# Altium PCB PCB_Auto.PcbDoc (part 1 of 2)
Units mil, origin at the board's own origin, x right, y up, seen from the top; angles counter-clockwise.
Board outline 2561 x 3309 mil, 4 copper layers (Top Layer, Mid Layer 1, Mid Layer 2, Bottom Layer), stack 61.811 mil thick; 134 components, 109 nets, 467 pads, 114 vias.
Unrouted connection lines stored in the file: 1.
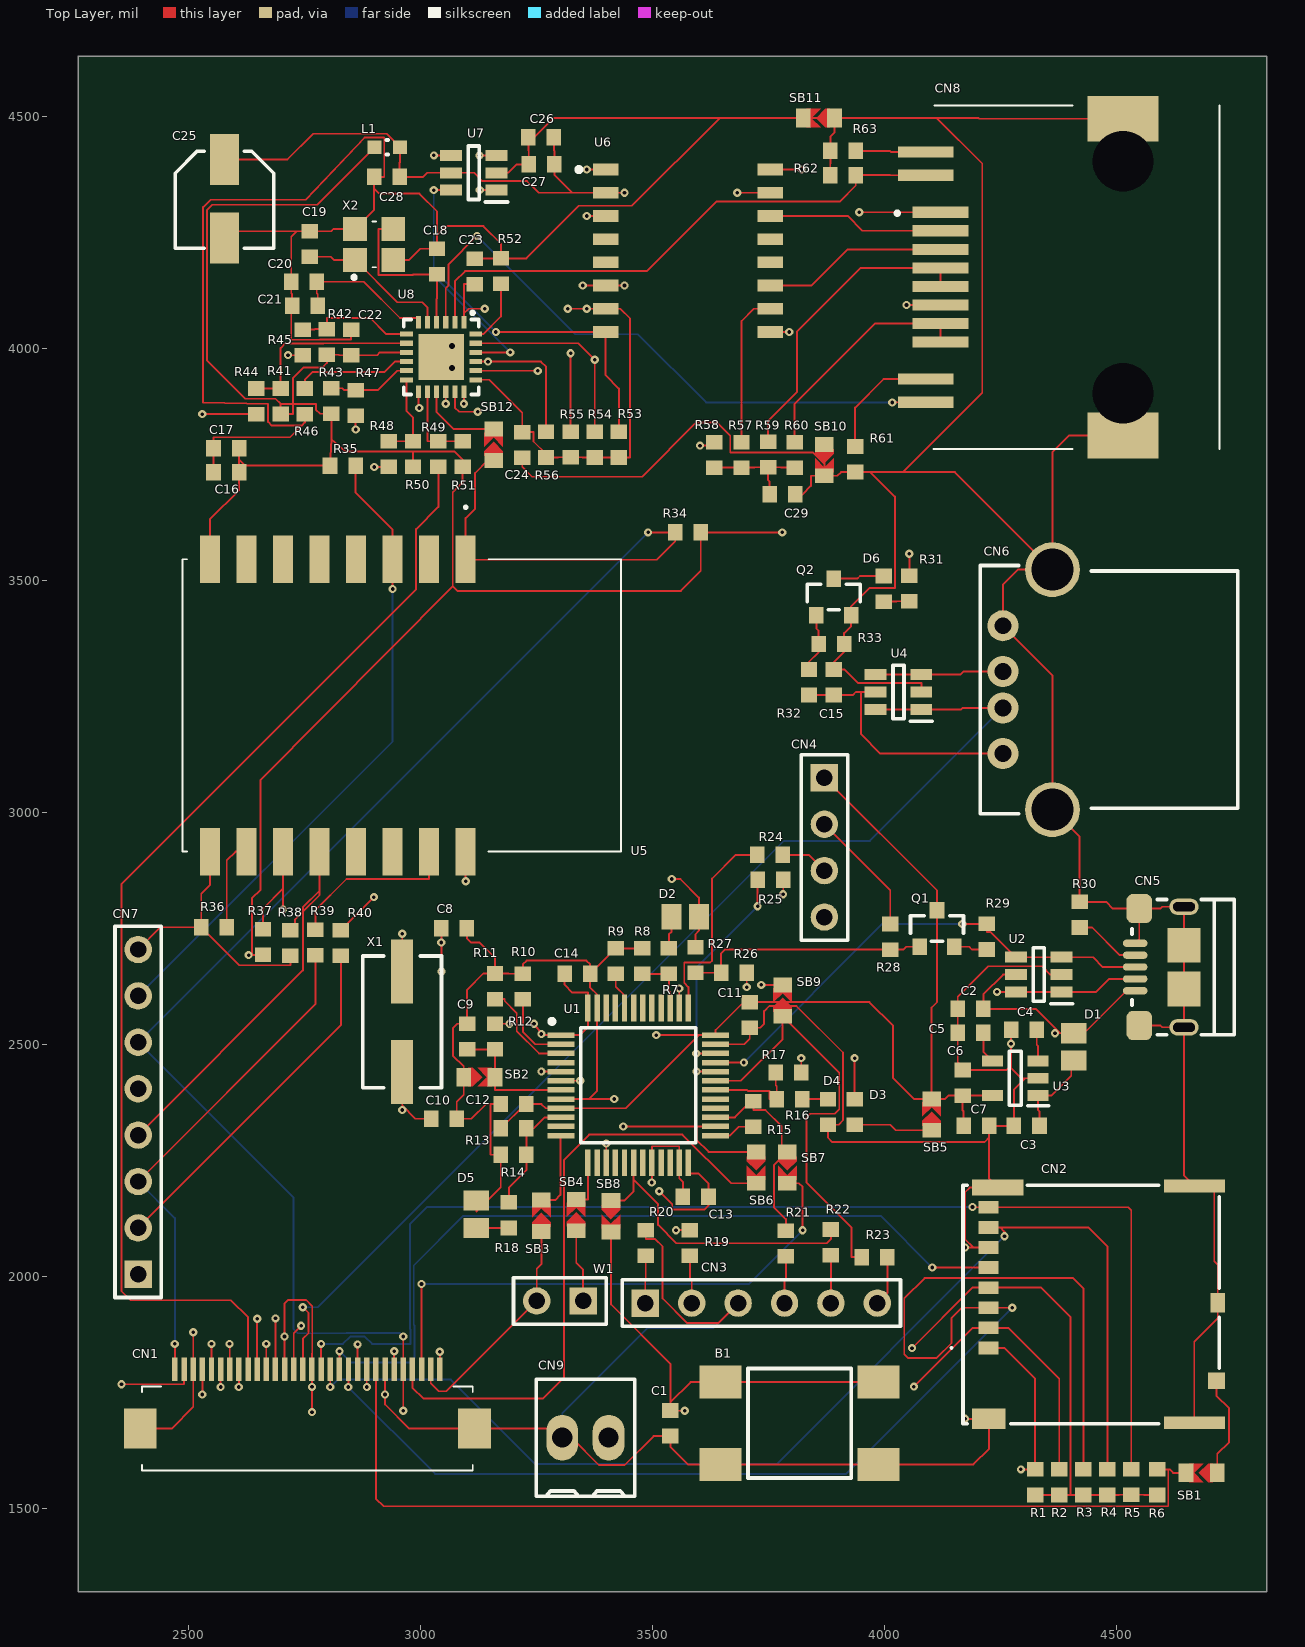
[diagram p0: Top Layer view]
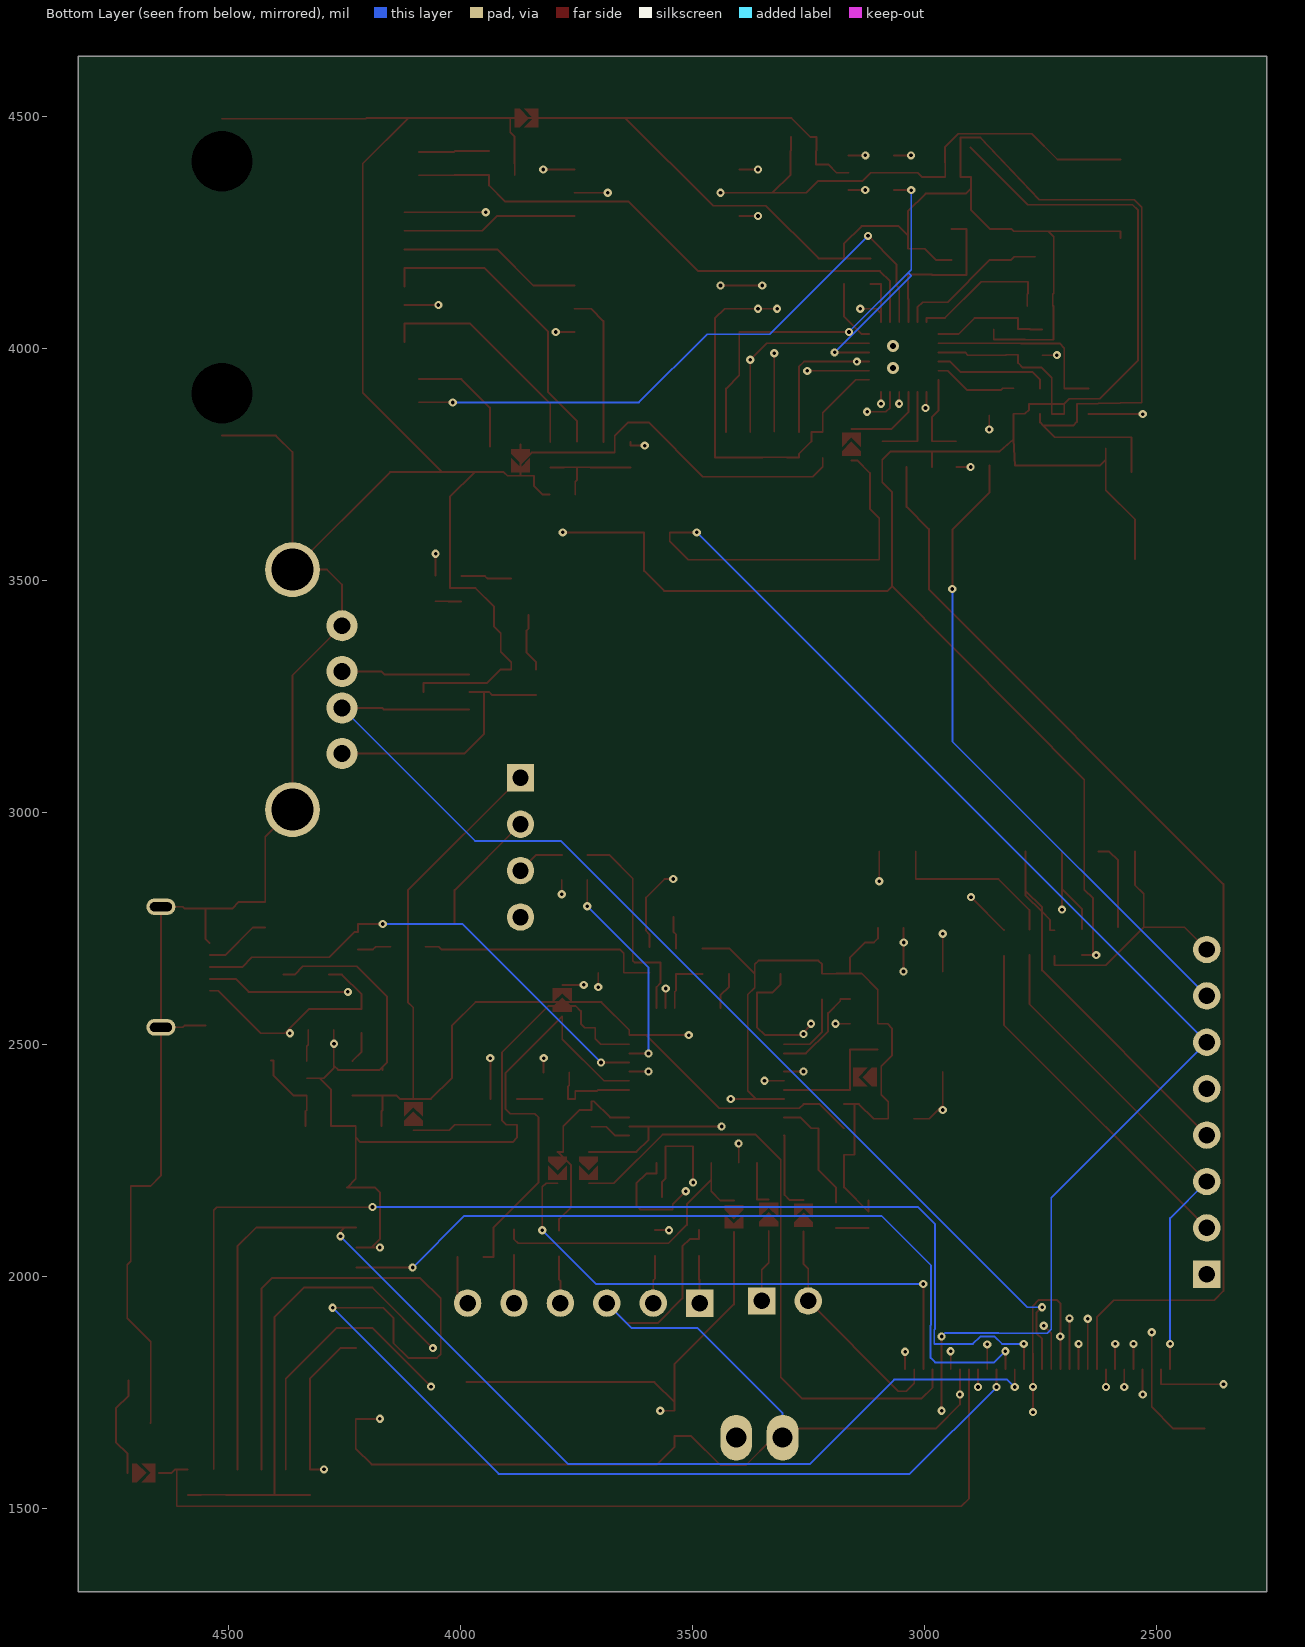
[diagram p1: Bottom Layer view, seen from below]
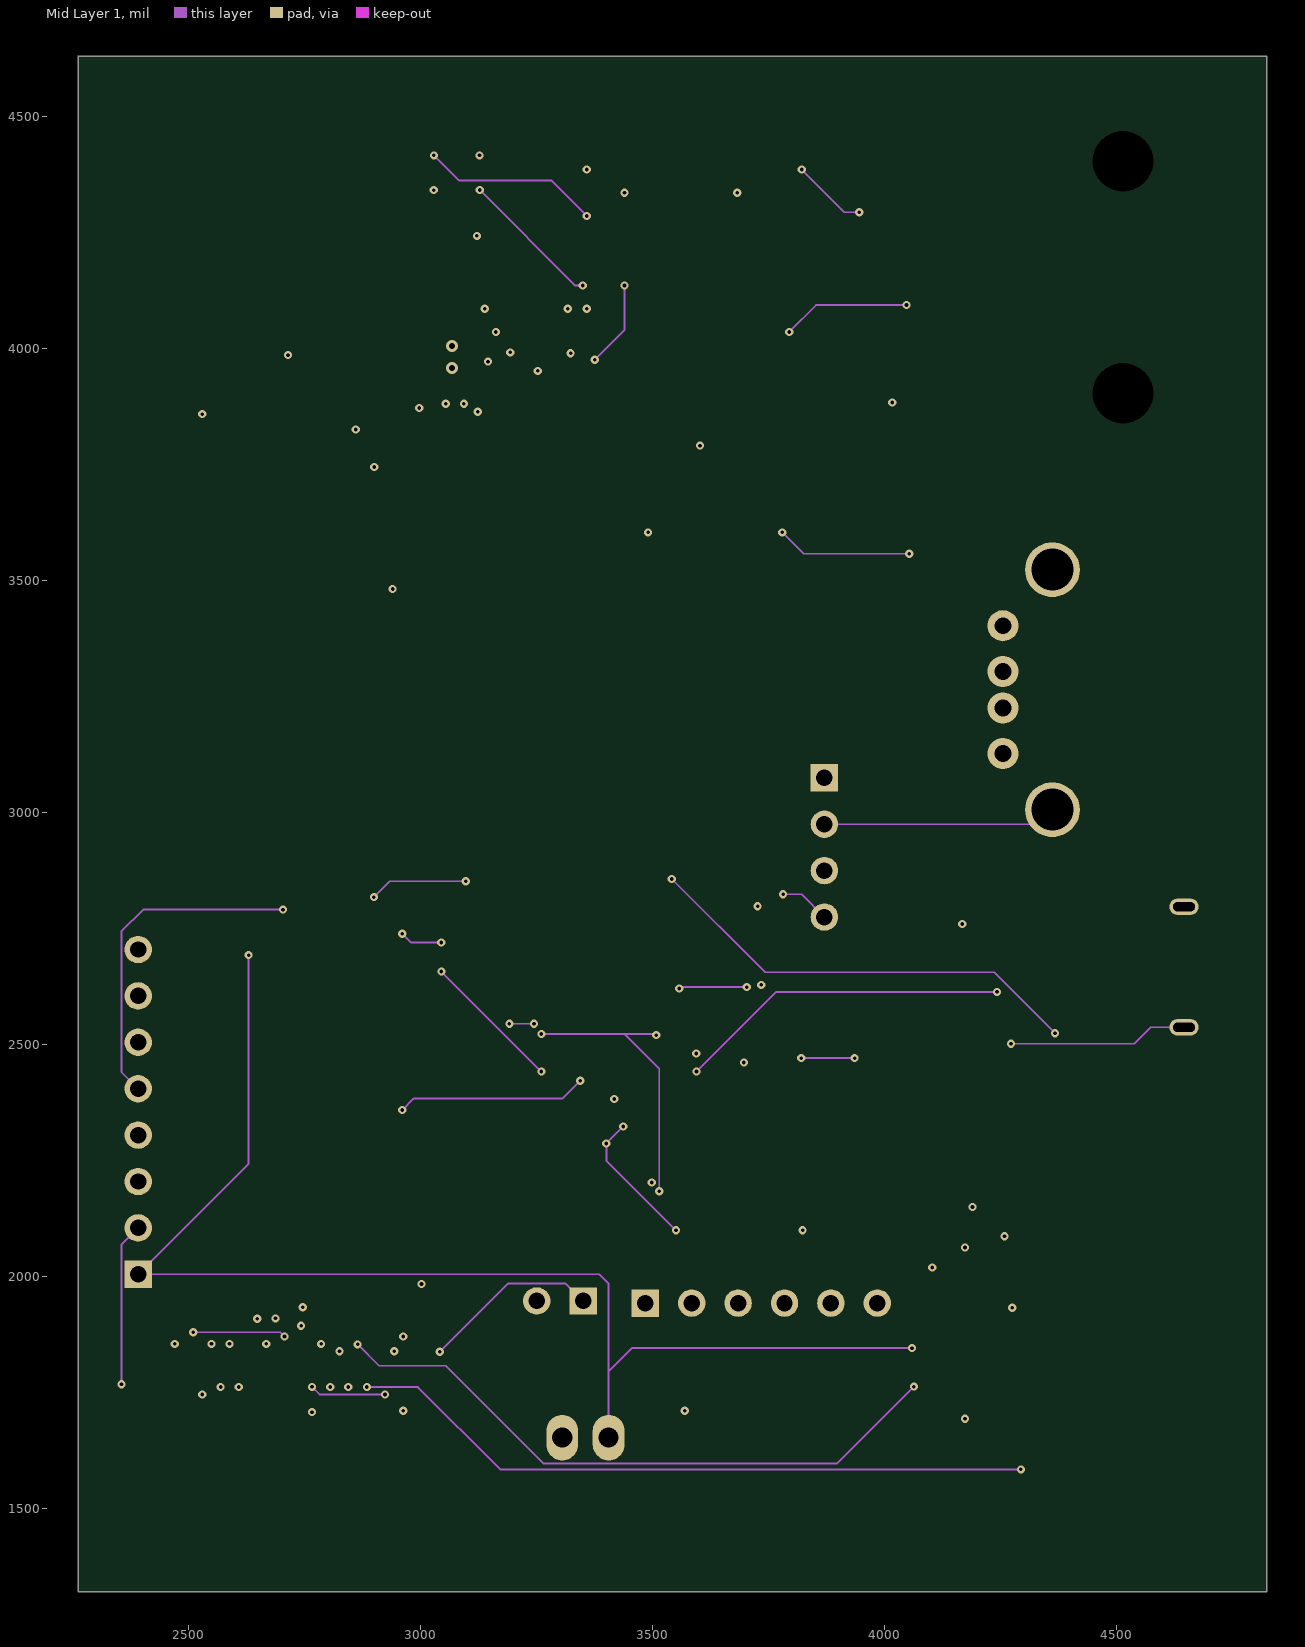
[diagram p2: Mid Layer 1]
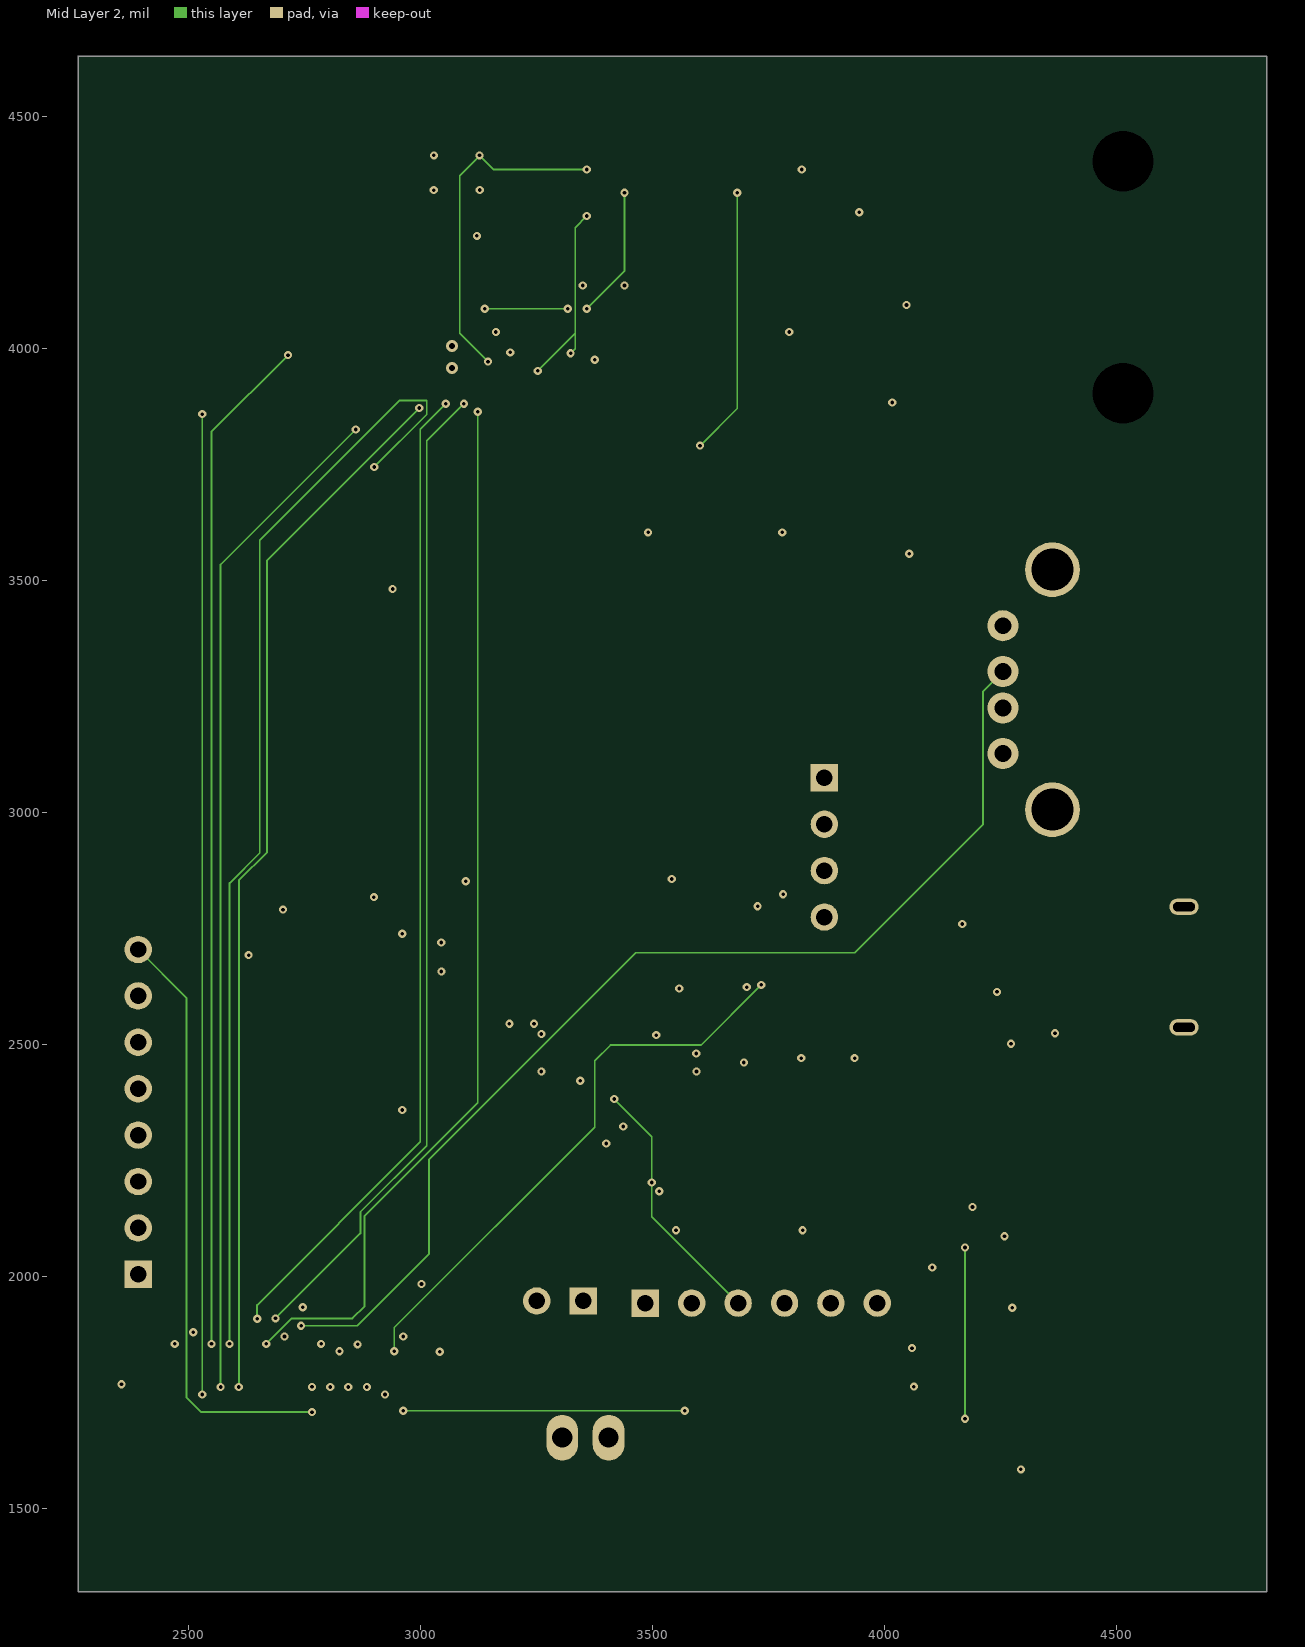
[diagram p3: Mid Layer 2]

## Layer stack, top to bottom
Top Solder: solder mask 0.5, Solder Resist, Dk 3.8
Top Layer: signal copper 1.378
Dielectric 1: prepreg 3.937, 2313, Dk 4.05
Mid Layer 1: signal copper 0.689
Core: core 49.8031, FR-4, Dk 4.5
Mid Layer 2: signal copper 0.689
Dielectric 2: prepreg 3.937, 2313, Dk 4.05
Bottom Layer: signal copper 1.378
Bottom Solder: solder mask 0.5, Solder Resist, Dk 3.8

## Board outline
2263,1320 4824,1320 4824,4564 4824,4629 2263,4629

## Design rules (kind name [scope] priority, off if disabled: settings)
BoardOutlineClearance [All] p1: gap=7.87 ignorepadtopadclearanceinfootprint=FALSE
Clearance [All] p1: gap=4 ignorepadtopadclearanceinfootprint=FALSE except(5: Arc-Via Track-Via SMDPad-Via THPad-Via Via-Via Via-Fill Via-Poly Via-Region Via-Text; 9.84: Arc-Hole Track-Hole SMDPad-Hole THPad-Hole Via-Hole Fill-Hole Poly-Hole Region-Hole Text-Hole)
ComponentClearance [All] p1: gap=4 collisioncheckmode=3 verticalgap=4 showdistances=TRUE
DiffPairsRouting [All] p1: maxlimit=4 minlimit=4 mostfreqgap=4 toplayer_minwidth=4 toplayer_maxwidth=71497.94 toplayer_prefwidth=4 midlayer1_minwidth=4 midlayer1_maxwidth=71497.94 midlayer1_prefwidth=4 midlayer2_minwidth=4 midlayer2_maxwidth=71497.94 midlayer2_prefwidth=4 bottomlayer_minwidth=4 bottomlayer_maxwidth=71497.94 bottomlayer_prefwidth=4 maxuncoupledlength=500
Height [All] p1: minheight=0 maxheight=71497.94 prefheight=500
HoleSize [All] p1: absolutevalues=TRUE maxlimit=248.03 minlimit=7.87 maxpercent=80.000 minpercent=20.000
HoleToHoleClearance [All] p1: gap=9.84 allowstackedmicrovias=FALSE
MinimumAnnularRing [All] p1: minimumring=3
MinimumSolderMaskSliver [All] p1: minsoldermaskwidth=0
PlaneClearance [All] p1: clearance=4
PlaneConnect PlaneConnectPowerPads [InPadClass('PowerPads')] p1: planeconnectstyle=Direct reliefexpansion=20 reliefentries=4 reliefconductorwidth=10 reliefairgap=10
PlaneConnect [All] p2: pad.planeconnectstyle=Relief pad.reliefexpansion=11.81 pad.reliefentries=4 pad.reliefconductorwidth=4 pad.reliefairgap=4 via.planeconnectstyle=Direct via.reliefexpansion=11.81 via.reliefentries=4 via.reliefconductorwidth=5 via.reliefairgap=5
PolygonConnect PolygonConnectPowerPads [All vs (InPadClass('PowerPads'))] p1: connectstyle=Direct reliefconductorwidth=10 reliefentries=4 polygonreliefangle="90 Angle" airgapwidth=10
PolygonConnect [All] p2: thpad.connectstyle=Relief thpad.reliefconductorwidth=4 thpad.reliefentries=4 thpad.polygonreliefangle="90 Angle" thpad.airgapwidth=4 smdpad.connectstyle=Relief smdpad.reliefconductorwidth=4 smdpad.reliefentries=4 smdpad.polygonreliefangle="90 Angle" smdpad.airgapwidth=4 via.connectstyle=Direct via.reliefconductorwidth=5 via.reliefentries=4 via.polygonreliefangle="90 Angle" via.airgapwidth=5
RoutingVias [All] p1: holewidth=7.87 width=17.72 viastyle="Through Hole" minholewidth=7.87 minwidth=17.72 maxholewidth=248.03 maxwidth=257.87
SilkToSilkClearance [All] p1: silktosilkclearance=0
SilkToSolderMaskClearance [IsPad] p1: minsilkscreentomaskgap=4 clearancetoexposedcopper=TRUE
SolderMaskExpansion [All] p1: expansion=2.95 istentingtop=FALSE
Width [All] p1: maxlimit=71497.94 minlimit=4 preferedwidth=4
20 further rules are at their usual default settings.

## Classes and differential pairs
component class WiFi: C16 C17 CN7 R34 R35 R36 R37 R38 R39 R40 U5
component class USB: C15 CN6 D6 Q2 R31 R32 R33 U4
component class STLINK: C2 C3 C4 C5 C6 C7 C8 C9 C10 C11 C12 C13 C14 CN3 CN4 CN5 D1 D2 D3 D4 D5 Q1 R7 R8 R9 R10 R11 R12 R13 R14 R15 R16 R17 R18 R19 R20 R21 R22 R23 R24 R25 R26 R27 R28 R29 R30 SB2 SB3 SB4 SB5 SB6 SB7 SB8 SB9 U1 U2 U3 W1 X1
component class SD: CN2 R1 R2 R3 R4 R5 R6 SB1
component class Extension_Board: B1 C1 CN1 CN9
component class Ethernet: C18 C19 C20 C21 C22 C23 C24 C25 C26 C27 C28 C29 CN8 L1 R41 R42 R43 R44 R45 R46 R47 R48 R49 R50 R51 R52 R53 R54 R55 R56 R57 R58 R59 R60 R61 R62 R63 SB10 SB11 SB12 U6 U7 U8 X2
differential pair TX: +TX_P -TX_N
differential pair TD: +TD_P -TD_N
differential pair STLINK: +STLINK_P -STLINK_N
differential pair RX: +RX_P -RX_N
differential pair RD: +RD_P -RD_N
differential pair FS_DM: +FS_DM_P -FS_DM_N

## Components (designator, comment, footprint, x,y, rotation, side; value= is the part's Value field where it differs from the comment)
B1 "RESET" PB-6X6mm-Blue 3817,1683 r180 top
C1 "Cap" 1608[0603] 3539,1683 r270 top value=100nF
C2 "Cap" 1608[0603] 4186,2576 r0 top value=100nF
C3 "X5R" 1608[0603] 4306.88,2324 r0 top value=1uF
C4 "X5R" 1608[0603] 4301,2531.16 r180 top value=100nF
C5 "X7R" 1608[0603] 4186,2524.75 r0 top value=10nF
C6 "X5R" 1608[0603] 4168.69,2416.69 r270 top value=1uF
C7 "X5R" 1608[0603] 4198.44,2324 r0 top value=100nF
C8 "Cap" 1608[0603] 3073,2750 r0 top value=6pF
C9 "Cap" 1608[0603] 3101,2516.29 r270 top value=100nF
C10 "Cap" 1608[0603] 3051,2339.4 r0 top value=6pF
C11 "Cap" 1608[0603] 3710,2563 r90 top value=100nF
C12 "Cap" 1608[0603] 3201,2371 r0 top value=100nF
C13 "Cap" 1608[0603] 3593.56,2170.91 r0 top value=100nF
C14 "Cap" 1608[0603] 3338.55,2651.56 r180 top value=100nF
C15 "Cap" 1608[0603] 3891,3280 r270 top value=100nF
C16 "Cap" 1608[0603] 2582,3733 r180 top value=100nF
C17 "Cap" 1608[0603] 2582,3784.25 r180 top value=100nF
C18 "Cap" 1608[0603] 3036,4186.56 r270 top value=6pF
C19 "Cap" 1608[0603] 2762,4224.44 r270 top value=6pF
C20 "Cap" 1608[0603] 2749.44,4143.25 r180 top value=470pF
C21 "X5R" 1608[0603] 2751.44,4091 r180 top value=1uF
C22 "Cap" 1608[0603] 2851,4012.44 r90 top value=100nF
C23 "Cap" 1608[0603] 3117,4165.56 r90 top value=100nF
C24 "Cap" 1608[0603] 3219.75,3791.44 r270 top value=100nF
C25 "10µF" "CAP ALSMD 5.3MM H5.4MM" 2578,4322 r270 top
C26 "Cap" 1608[0603] 3260.44,4455 r180 top value=100nF
C27 "Cap" 1608[0603] 3261.44,4396 r180 top value=100nF
C28 "Cap" 1608[0603] 2928,4369 r0 top value=100nF
C29 "Cap" 1608[0603] 3780.44,3685 r180 top value=100nF
CN1 "FH12-30S-0.5SH" FH1230S05SH 2756.73,1671.44 r180 top
CN2 "MEM2080-00-128-00-A" MEM20800012800A 4446,1939 r90 top
CN3 "Header 6" HDR1X6 3485,1942 r0 top
CN4 "Header 4" HDR1X4 3871,3074 r270 top
CN5 "10118193-0001LF" "FCI USB 10118193-0001LF" 4644.03,2666.24 r270 top
CN6 "USB-A1HSW6" "ON SHORE TECHNOLOGY USB-A1HSW6" 4486,3264 r90 top
CN7 "Header 8" HDR1X8 2392,2004 r90 top
CN8 "6339191-1" 63391911 4406,4153 r90 top
CN9 "282834-2" "TE 282834-2" 3356,1652 r180 top
D1 "BAT60JFILM" C0805 4408.46,2494 r270 top
D2 "BAT60JFILM" C0805 3571,2774.25 r180 top
D3 "Green" 1608[0603] 3936,2354 r90 top
D4 "Red" 1608[0603] 3878.75,2354 r270 top
D5 "BAT60JFILM" C0805 3121,2133.53 r270 top
D6 "Green" 1608[0603] 3998.75,3481.44 r90 top
L1 "BEAD" 0603L 2929,4433 r0 top value=100uH
Q1 "MMBT3904-TP" "MCCSEMI SOT-23-3" 4113.6,2749.37 r90 top
Q2 "MMBT3904-TP" "MCCSEMI SOT-23-3" 3891,3464 r90 top
R1 "Res1" 1608[0603] 4325,1556 r90 top value=47k
R2 "Res1" 1608[0603] 4377,1556 r90 top value=47k
R3 "Res1" 1608[0603] 4429,1556 r90 top value=47k
R4 "Res1" 1608[0603] 4481,1556 r90 top value=47k
R5 "Res1" 1608[0603] 4532.25,1556.44 r90 top value=47k
R6 "Res1" 1608[0603] 4588,1556 r270 top value=47k
R7 "Res1" 1608[0603] 3535.9,2679 r270 top value=2k7
R8 "Res1" 1608[0603] 3478.65,2679 r90 top value=4k7
R9 "Res1" 1608[0603] 3421.39,2679 r90 top value=100k
R10 "Res1" 1608[0603] 3221,2624.12 r90 top value=10k
R11 "Res1" 1608[0603] 3161,2624.73 r270 top value=10k
R12 "Res1" 1608[0603] 3161,2516.29 r90 top value=100k
R13 "Res1" 1608[0603] 3201,2318.81 r180 top value=4k7
R14 "Res1" 1608[0603] 3201,2261.56 r180 top value=4k7
R15 "Res1" 1608[0603] 3717.9,2349.46 r270 top value=100R
R16 "Res1" 1608[0603] 3795.9,2381.75 r180 top value=330R
R17 "Res1" 1608[0603] 3793.56,2439 r180 top value=330R
R18 "Res1" 1608[0603] 3191,2131.44 r270 top value=100R
R19 "Res1" 1608[0603] 3581,2071.56 r270 top value=22R
R20 "Res1" 1608[0603] 3486,2071.56 r270 top value=10k
R21 "Res1" 1608[0603] 3788,2070.44 r270 top value=22R
R22 "Res1" 1608[0603] 3885,2073 r270 top value=22R
R23 "Res1" 1608[0603] 3979,2041 r0 top value=22R
R24 "Res1" 1608[0603] 3754,2908 r0 top value=22R
R25 "Res1" 1608[0603] 3754.56,2854 r0 top value=22R
R26 "Res1" 1608[0603] 3676,2654 r180 top value=100R
R27 "Res1" 1608[0603] 3593.16,2681.56 r90 top value=10k
R28 "Res1" 1608[0603] 4013,2731.44 r270 top value=36k
R29 "Res1" 1608[0603] 4221,2731.56 r90 top value=1k5
R30 "Res1" 1608[0603] 4421,2779 r270 top value=100k
R31 "Res1" 1608[0603] 4054,3482 r90 top value=330
R32 "Res1" 1608[0603] 3837.75,3280 r270 top value=47k
R33 "Res1" 1608[0603] 3886,3362.45 r180 top value=22k
R34 "Res1" 1608[0603] 3577,3603 r0 top value=10k
R35 "Res1" 1608[0603] 2833,3747 r180 top value=10k
R36 "Res1" 1608[0603] 2555.44,2752 r180 top value=10k
R37 "Res1" 1608[0603] 2661,2720 r270 top value=10k
R38 "Res1" 1608[0603] 2720,2718 r270 top value=10k
R39 "Res1" 1608[0603] 2774,2719.44 r90 top value=100R
R40 "Res1" 1608[0603] 2829,2718 r90 top value=100R
R41 "Res1" 1608[0603] 2698.98,3885.56 r270 top value=10k
R42 "Res1" 1608[0603] 2798.75,4013.44 r270 top value=10k
R43 "Res1" 1608[0603] 2808.49,3886.14 r270 top value=10k
R44 "Res1" 1608[0603] 2646.73,3885.44 r270 top value=33R
R45 "Res1" 1608[0603] 2746.49,4012.44 r270 top value=33R
R46 "Res1" 1608[0603] 2751.24,3885.44 r270 top value=10k
R47 "Res1" 1608[0603] 2860.75,3882.14 r270 top value=33R
R48 "Res1" 1608[0603] 2932,3771.7 r270 top value=33R
R49 "Res1" 1608[0603] 2984.25,3771.7 r270 top value=1k5
R50 "Res1" 1608[0603] 3039,3771.7 r270 top value=33R
R51 "Res1" 1608[0603] 3091.25,3771.7 r270 top value=10k
R52 "Res1" 1608[0603] 3174,4166 r270 top value=12k1
R53 "Res1" 1608[0603] 3428,3792 r270 top value=50R
R54 "Res1" 1608[0603] 3376,3792 r270 top value=50R
R55 "Res1" 1608[0603] 3324,3792.44 r270 top value=50R
R56 "Res1" 1608[0603] 3271,3792 r270 top value=50R
R57 "Res1" 1608[0603] 3692.25,3770 r90 top value=75R
R58 "Res1" 1608[0603] 3634,3770 r90 top value=75R
R59 "Res1" 1608[0603] 3749.51,3771 r90 top value=75R
R60 "Res1" 1608[0603] 3806.76,3770 r90 top value=75R
R61 "Res1" 1608[0603] 3937,3760.56 r90 top value=270R
R62 "Res1" 1608[0603] 3911,4373 r0 top value=10k
R63 "Res1" 1608[0603] 3911.33,4425.25 r0 top value=270R
SB1 "Closed" SB_0603 4684,1576 r0 top
SB2 "Open" SB_0603 3127.33,2429.14 r180 top
SB3 "Closed" SB_0603 3261,2130.31 r270 top
SB4 "Closed" SB_0603 3336,2131.56 r270 top
SB5 "Closed" SB_0603 4102,2348.25 r270 top
SB6 "Closed" SB_0603 3724,2234 r90 top
SB7 "Closed" SB_0603 3791,2234 r90 top
SB8 "Closed" SB_0603 3411,2129 r90 top
SB9 "Closed" SB_0603 3781,2594 r270 top
SB10 "Open" SB_0603 3870.91,3758.75 r90 top
SB11 "Open" SB_0603 3859.25,4496 r0 top
SB12 "Closed" SB_0603 3158,3791.75 r270 top
U1 "STM32F103CBT6" QFP50P900X900X160-48N 3469.68,2411.23 r0 top
U2 "USBLC6-2SC6" SOT95P280X145-6N 4333,2650 r180 top
U3 "LD3985M33R" SOT95P280X145-5N 4282.31,2426.53 r180 top
U4 "USBLC6-2SC6" SOT95P280X145-6N 4030.55,3259 r180 top
U5 "ESP-12S" ESP12S 2960,3230 r270 top
U6 "KMS-1102NL" Transformer 3577,4210 r270 top
U7 "USBLC6-4SC6" SOT95P280X145-6N 3115,4378 r180 top
U8 "LAN8742A-CZ-TR" QFN24_0R5_4X4 3045,3981 r270 top
W1 "Open" HDR1X2 3351,1946.56 r180 top
X1 "8 MHz" "ECS CSM-3X" 2961,2548.15 r90 top value="12 MHz"
X2 "EB2532JA12-25.000M_TR" EB2532JA1225000MTR 2900.66,4223.54 r90 top

## Footprints (in the part's own frame and the unit in brackets; to place one, negate y for a bottom-side part, rotate by r counter-clockwise, add the part's x,y. Pads: shape width x height; smd on the part's side, far side on the other; paste and mask are expansions set on the pad)
0603L [mil] "Bead 0603L"
  rect 30x30 smd: 1(27.5,0) 2(-27.5,0)
  silkscreen extent -2,-16 2,16, body extent -34,-19 34,19, height 24
1608[0603] [mm] "Chip Capacitor, Body 1.6x0.8mm, IPC High Density"
  rect 0.8x0.9 smd: 1(-0.7,0) 2(0.7,0)
  body extent -0.87,-0.48 0.87,0.48, height 1.3
63391911 [mm]
  rect 0.61x3.05 smd: 1(3.556,7.24) 2(2.54,7.24) 3(1.524,7.24) 4(0.508,7.24) 5(-0.508,7.24) 6(-1.524,7.24) 7(-2.54,7.24) 8(-3.556,7.24) 9(-5.58,8.04) 10(-6.85,8.04) 11(6.85,8.04) 12(5.58,8.04)
  round 1.665 hole 3.33 unplated: MH1(-6.35,-2.76) MH2(6.35,-2.76)
  rect 2.5x3.9 smd: MP1(-8.67,-2.76) MP2(8.67,-2.76)
  silkscreen extent -9.4,-8.04 9.4,9.7, body extent -9.4,-9.14 9.4,9.03, height 14.74
C0805 [mm] "Chip Capacitor, Body 2.0x1.3mm, IPC High Density"
  rect 1.1x1.4 smd: 1(-0.75,0) 2(0.75,0)
  body extent -1.1,-0.72 1.1,0.72, height 1.4
"CAP ALSMD 5.3MM H5.4MM" [mm] "Aluminum Electrolytic Capacitor, Body 5.30x5.30x5.40mm, IPC Low Density"
  rect 2.8x1.6 smd: 1(-2.15,0) 2(2.15,0)
  silkscreen extent -2.6,-2.7 2.7,2.7, body extent -2.95,-2.7 2.95,2.7, height 5.4
EB2532JA1225000MTR [mm]
  rect 1.3x1.3 smd: 1(-0.85,1.05) 2(-0.85,-1.05) 3(0.85,-1.05) 4(0.85,1.05)
  silkscreen extent -1.9,-0.1 1.25,1.2, body extent -1.37,-1.6 1.37,1.6, height 0.9
"ECS CSM-3X" [mm] "Crystal, 2-Leads, Body 4.10x7.00mm, Pitch 5.00mm, IPC Medium Density"
  rect 3.5x1.2 smd: 1(-2.75,0) 2(2.75,0)
  silkscreen extent -3.6,-2.15 3.6,2.15, body extent -3.8,-2.05 3.8,2.05, height 2.3
ESP12S [mm]
  rect 2.6x1.1 smd: 1(-8,3.5) 2(-8,1.5) 3(-8,-0.5) 4(-8,-2.5) 5(-8,-4.5) 6(-8,-6.5) 7(-8,-8.5) 8(-8,-10.5) 9(8,-10.5) 10(8,-8.5) 11(8,-6.5) 12(8,-4.5) 13(8,-2.5) 14(8,-0.5) 15(8,1.5) 16(8,3.5)
  silkscreen extent -10.9,-12 8,12, body extent -8,-12 8,12, height 3.1
"FCI USB 10118193-0001LF" [mm] "USB 2.0 Type B Micro"
  oval 0.4x1.35 smd: 1(1.3,-2.625) 2(0.65,-2.625) 3(0,-2.625) 4(-0.65,-2.625) 5(-1.3,-2.625)
  oval 0.9x1.6 hole 0.5 slot 1.2 at 90 deg: S(-3.3,0.05) S(3.3,0.05)
  rrect50% 1.6x1.4 smd: S(-3.2,-2.4) S(3.2,-2.4)
  rect 1.9x1.8 smd: S(-1.2,0.05) S(1.2,0.05)
  silkscreen extent -3.7,-2.8 3.7,2.8, body extent -3.93,-2.9 3.93,2.76, height 2.78
FH1230S05SH [mm]
  rect 0.3x1.3 smd: 1(-7.25,-3.25) 2(-6.75,-3.25) 3(-6.25,-3.25) 4(-5.75,-3.25) 5(-5.25,-3.25) 6(-4.75,-3.25) 7(-4.25,-3.25) 8(-3.75,-3.25) 9(-3.25,-3.25) 10(-2.75,-3.25) 11(-2.25,-3.25) 12(-1.75,-3.25) 13(-1.25,-3.25) 14(-0.75,-3.25) 15(-0.25,-3.25) 16(0.25,-3.25) 17(0.75,-3.25) 18(1.25,-3.25) 19(1.75,-3.25) 20(2.25,-3.25) 21(2.75,-3.25) 22(3.25,-3.25) 23(3.75,-3.25) 24(4.25,-3.25) 25(4.75,-3.25) 26(5.25,-3.25) 27(5.75,-3.25) 28(6.25,-3.25) 29(6.75,-3.25) 30(7.25,-3.25)
  rect 1.8x2.2 smd: MP1(-9.15,0) MP2(9.15,0)
  silkscreen extent -9.05,-2.3 9.05,2.3
HDR1X2 [mm] "Connector; Header; 2 Position"
  rect 1.5x1.5 hole 0.9: 1(0,0)
  round 1.5 hole 0.9: 2(2.54,0)
  silkscreen extent -1.27,-1.27 3.81,1.27
HDR1X4 [mm] "Connector; Header; 4 Position"
  rect 1.5x1.5 hole 0.9: 1(0,0)
  round 1.5 hole 0.9: 2(2.54,0) 3(5.08,0) 4(7.62,0)
  silkscreen extent -1.27,-1.27 8.89,1.27
HDR1X6 [mm] "Connector; Header; 6 Position"
  rect 1.5x1.5 hole 0.9: 1(0,0)
  round 1.5 hole 0.9: 2(2.54,0) 3(5.08,0) 4(7.62,0) 5(10.16,0) 6(12.7,0)
  silkscreen extent -1.27,-1.27 13.97,1.27
HDR1X8 [mm] "Connector; Header; 8 Position"
  rect 1.5x1.5 hole 0.9: 1(0,0)
  round 1.5 hole 0.9: 2(2.54,0) 3(5.08,0) 4(7.62,0) 5(10.16,0) 6(12.7,0) 7(15.24,0) 8(17.78,0)
  silkscreen extent -1.27,-1.27 19.05,1.27
"MCCSEMI SOT-23-3" [mm] "SOT23, 3-Leads, Body 2.92x2.37mm, Pitch 0.95mm, IPC Medium Density"
  rect 0.9x0.8 smd: 1(-1,0.95) 2(-1,-0.95) 3(1,0)
  silkscreen extent -0.7,-1.45 0.7,1.45, body extent -1.16,-1.45 1.16,1.45, height 1.5
MEM20800012800A [mm]
  rect 0.9x0.93 smd: DSW1(-4.17,-6.85)
  rect 1.05x0.78 smd: DSW2(0.095,-6.925)
  rect 1.14x1.83 smd: MP1(-6.26,5.6)
  rect 0.86x2.8 smd: MP2(6.4,5.115)
  rect 0.7x3.33 smd: MP3(6.48,-5.65) MP4(-6.48,-5.65)
  rect 0.7x1.1 smd: P1(-2.38,5.615) P2(-1.28,5.615) P3(-0.18,5.615) P4(0.92,5.615) P5(2.02,5.615) P6(3.12,5.615) P7(4.22,5.615) P8(5.32,5.615)
  silkscreen extent -6.53,-7.02 6.53,7.7, body extent -6.76,-7.24 6.76,7.01, height 1.58
"ON SHORE TECHNOLOGY USB-A1HSW6" [mm] "USB2.0 TYPEA 4 Pin Pitch 2-2.5mm"
  round 1.7 hole 0.92: 1(-3.5,5.85) 2(-1,5.85) 3(1,5.85) 4(3.5,5.85)
  round 3 hole 2.3: S(-6.57,3.14) S(6.57,3.14)
  silkscreen extent -6.8,-7 6.8,7.1, body extent -7.9,-7.05 7.9,7.05, height 7.6
PB-6X6mm-Blue [mm] "Surface Mounting Type Tact Switch, 4-Leads, Body 6x6mm, Height 4.5mm,Blue"
  rect 2.3x1.8 smd: 1(4.325,2.25) 2(4.325,-2.25) 3(-4.325,-2.25) 4(-4.325,2.25)
  silkscreen extent -2.83,-3 2.81,3, body extent -3,-3 3,3, height 10.5
QFN24_0R5_4X4 [mm] "SQFN 24 Pins, Pitch 0.5mm, 4mmx4mm"
  rect 0.69x0.28 smd: 1(-1.9,1.25) 2(-1.9,0.75) 3(-1.9,0.25) 4(-1.9,-0.25) 5(-1.9,-0.75) 6(-1.9,-1.25) 13(1.9,-1.25) 14(1.9,-0.75) 15(1.9,-0.25) 16(1.9,0.25) 17(1.9,0.75) 18(1.9,1.25)
  rect 0.28x0.69 smd: 7(-1.25,-1.9) 8(-0.75,-1.9) 9(-0.25,-1.9) 10(0.25,-1.9) 11(0.75,-1.9) 12(1.25,-1.9) 19(1.25,1.9) 20(0.75,1.9) 21(0.25,1.9) 22(-0.25,1.9) 23(-0.75,1.9) 24(-1.25,1.9)
  rect 2.5x2.5 smd: 25(0,0)
  silkscreen extent -2.46,-2.05 2.05,2.05, body extent -2.05,-2.05 2.05,2.05, height 1
QFP50P900X900X160-48N [mm]
  rect 1.475x0.3 smd: 1(-4.238,2.75) 2(-4.238,2.25) 3(-4.238,1.75) 4(-4.238,1.25) 5(-4.238,0.75) 6(-4.238,0.25) 7(-4.238,-0.25) 8(-4.238,-0.75) 9(-4.238,-1.25) 10(-4.238,-1.75) 11(-4.238,-2.25) 12(-4.238,-2.75) 25(4.238,-2.75) 26(4.238,-2.25) 27(4.238,-1.75) 28(4.238,-1.25) 29(4.238,-0.75) 30(4.238,-0.25) 31(4.238,0.25) 32(4.238,0.75) 33(4.238,1.25) 34(4.238,1.75) 35(4.238,2.25) 36(4.238,2.75)
  rect 0.3x1.475 smd: 13(-2.75,-4.238) 14(-2.25,-4.238) 15(-1.75,-4.238) 16(-1.25,-4.238) 17(-0.75,-4.238) 18(-0.25,-4.238) 19(0.25,-4.238) 20(0.75,-4.238) 21(1.25,-4.238) 22(1.75,-4.238) 23(2.25,-4.238) 24(2.75,-4.238) 37(2.75,4.238) 38(2.25,4.238) 39(1.75,4.238) 40(1.25,4.238) 41(0.75,4.238) 42(0.25,4.238) 43(-0.25,4.238) 44(-0.75,4.238) 45(-1.25,4.238) 46(-1.75,4.238) 47(-2.25,4.238) 48(-2.75,4.238)
  silkscreen extent -4.85,-3.15 3.15,3.62, body extent -4.5,-4.5 4.5,4.5, height 1.6
SB_0603 [mil] "Jumper"
  rect 32x40 smd: 1(33.75,0) 2(-33.75,0)
  Top Layer region: -26.25,0 -16.25,0 3.75,-20 -26.25,-20
  Top Layer region: -26.25,0 -16.25,0 3.75,20 -26.25,20
  Top Layer region: 23.75,20 13.75,20 -6.25,0 13.75,-20 23.75,-20
SOT95P280X145-5N [mm]
  rect 1.15x0.6 smd: 1(-1.25,0.95) 2(-1.25,0) 3(-1.25,-0.95) 4(1.25,-0.95) 5(1.25,0.95)
  silkscreen extent -1.83,-1.47 0.32,1.5, body extent -1.4,-1.48 1.4,1.48, height 1.45
SOT95P280X145-6N [mm]
  rect 1.2x0.6 smd: 1(-1.25,0.95) 2(-1.25,0) 3(-1.25,-0.95) 4(1.25,-0.95) 5(1.25,0) 6(1.25,0.95)
  silkscreen extent -1.85,-1.46 0.3,1.6, body extent -1.4,-1.46 1.4,1.46, height 1.45
"TE 282834-2" [mm]
  oval 1.75x2.5 hole 1.1: 1(-1.27,0) 2(1.27,0)
  silkscreen extent -2.7,-3.2 2.7,3.2, body extent -2.77,-3.25 2.77,3.25, height 10
Transformer [mm]
  rect 0.64x1.4 smd: 1(-4.445,-4.51) 2(-3.175,-4.51) 3(-1.905,-4.51) 4(-0.635,-4.51) 5(0.635,-4.51) 6(1.905,-4.51) 7(3.175,-4.51) 8(4.445,-4.51) 9(4.445,4.51) 10(3.175,4.51) 11(1.905,4.51) 12(0.635,4.51) 13(-0.635,4.51) 14(-1.905,4.51) 15(-3.175,4.51) 16(-4.445,4.51)
  silkscreen extent -4.57,-6.09 -4.32,-5.84, body extent -6.4,-3 6.4,3, height 6

## Part data
B1: library part "SW PUSHBUTTON", "SE PUSHBUTTON"
C1 C2 C8 C9 C10 C11 C12 C13 C14 C15 C16 C17 C18 C19 C20 C22 C23 C24 C26 C27 C28 C29: "Capacitor", LatestRevisionDate=17-Jul-2002, LatestRevisionNote="Re-released for DXP Platform.", PackageDescription="Radial Cap, Thru-Hole; 2 Leads; 0.3 in Pin Spacing", PackageReference=RAD-0.3, Published=8-Jun-2000, Publisher="Altium Limited"
C3 C4 C5 C6 C7 C21: library part Cap, "Capacitor", LatestRevisionDate=17-Jul-2002, LatestRevisionNote="Re-released for DXP Platform.", PackageDescription="Radial Cap, Thru-Hole; 2 Leads; 0.3 in Pin Spacing", PackageReference=RAD-0.3, Published=8-Jun-2000, Publisher="Altium Limited"
C25: library part UZP1C100MCL1GB, "CAP ALUM 10UF 20% 16V SMD", Device Package="Radial, Can - SMD", Lifetime @ Temp.="2000 Hrs @ 85°C", manufacturer=Nichicon, Operating Temperature="-40°C ~ 85°C", Ripple Current @ High Frequency="34.5mA @ 10kHz", Ripple Current @ Low Frequency="23mA @ 120Hz", Supplier Part Number 1=493-10077-1-ND, Tolerance=±20%, Voltage - Rated=16V, Applications="General Purpose", Capacitance=10µF, componentlink1description=Datasheet, componentlink1url=//media.digikey.com/pdf/Data%20Sheets/Nichicon%20PDFs/ZP_Series.pdf, componentlink2description="DigiKey Link", componentlink2url=http://digikey.com/product-detail/en/nichicon/UZP1C100MCL1GB/493-10077-1-ND/3983922, Height - Seated (Max)="0.181\" (4.60mm)", lastupdated="9/2/2020 1:18:30 AM", Lifecycle Status=Active, Minimum Order=1, Mounting Type="Surface Mount", Package / Case="Radial, Can - SMD", packaging=TapeAndReel, Part Number=UZP1C100MCL1GB, Part Status=Active, partid=8608, Polarization=Bi-Polar, price=0.21, series=UZP, Size / Dimension="0.197\" Dia (5.00mm)", Supplier 1=DigiKey, Surface Mount Land Size="0.209\" L x 0.209\" W (5.30mm x 5.30mm)"
CN1: "Connector", Manufacturer_Name=Hirose, Datasheet Link=https://datasheet.datasheetarchive.com/originals/dk/DKDS-2/23451.pdf, Height=4.8mm, Manufacturer_Part_Number=FH12-30S-0.5SH
CN2: "Connector", Manufacturer_Name="GCT (GLOBAL CONNECTOR TECHNOLOGY)", Mouser Part Number=640-MEM2080-0012800A, Datasheet Link=https://gct.co/newark/connector/MEM2080, Height=1.48mm, Manufacturer_Part_Number=MEM2080-00-128-00-A, Mouser Price/Stock=https://www.mouser.co.uk/ProductDetail/GCT/MEM2080-00-128-00-A?qs=vvQtp7zwQdPJXzpf1SnYug%3D%3D
CN3: "Header, 6-Pin", LatestRevisionDate=17-Jul-2002, LatestRevisionNote="Re-released for DXP Platform.", Publisher="Altium Limited"
CN4: "Header, 4-Pin", LatestRevisionDate=17-Jul-2002, LatestRevisionNote="Re-released for DXP Platform.", Publisher="Altium Limited"
CN5: "CONN RCPT USB2.0 MICRO B SMD R/A", Current Rating (Amps)="1.8A per Contact", manufacturer="Amphenol ICC (FCI)", Operating Temperature="-30°C ~ 80°C", Supplier Part Number 1=609-4616-2-ND, Voltage - Rated=100VAC, componentlink1description=Datasheet, componentlink1url=https://cdn.amphenol-icc.com/media/wysiwyg/files/documentation/datasheet/inputoutput/io_usb_micro.pdf, componentlink2description="DigiKey Link", componentlink2url=//digikey.com/product-detail/en/amphenol-icc-fci/10118193-0001LF/609-4616-2-ND/2785388, Connector Type="USB - micro B", Features="Solder Retention", Gender=Receptacle, lastupdated="12/9/2019 8:51:28 PM", Lifecycle Status=0, Mating Cycles=10000, Minimum Order=1, Mounting Feature=Horizontal, Mounting Type="Surface Mount, Right Angle; Through Hole", Number of Contacts=5, Number of Ports=1, packaging=TapeAndReel, Part Number=10118193-0001LF, Part Status=Active, price=0.21, series=-, Shielding=Shielded, Specifications="USB 2.0", Supplier 1=DigiKey, Termination=Solder
CN6: "CONN RCPT TYPEA 4POS R/A", Current Rating (Amps)=1A, manufacturer="On Shore Technology Inc.", Operating Temperature="0°C ~ 85°C", Supplier Part Number 1=ED2989-ND, Voltage - Rated=30VAC, componentlink1description=Datasheet, componentlink1url=http://www.on-shore.com/wp-content/uploads/USB-A1HSXX.pdf, componentlink2description="DigiKey Link", componentlink2url=http://digikey.com/product-detail/en/on-shore-technology-inc/USB-A1HSW6/ED2989-ND/2677750, Connector Type="USB - A", Features="Board Lock", Gender=Receptacle, lastupdated="4/30/2020 11:56:44 AM", Lifecycle Status=Active, Minimum Order=1, Mounting Feature=Horizontal, Mounting Type="Through Hole, Right Angle", Number of Contacts=4, Number of Ports=1, packaging=Tray, Part Number=USB-A1HSW6, Part Status=Active, price=0.48, series=-, Shielding=Unshielded, Supplier 1=DigiKey, Termination=Solder
CN7: "Header, 8-Pin", LatestRevisionDate=17-Jul-2002, LatestRevisionNote="Re-released for DXP Platform.", Publisher="Altium Limited"
CN8: "Connector", Manufacturer_Name="TE Connectivity", Mouser Part Number=571-6339191-1, Arrow Part Number=6339191-1, Arrow Price/Stock=https://www.arrow.com/en/products/6339191-1/te-connectivity?region=europe, Datasheet Link=http://www.te.com/commerce/DocumentDelivery/DDEController?Action=srchrtrv&DocNm=6339191&DocType=Customer+Drawing&DocLang=English&DocFormat=pdf&PartCntxt=6339191-1, Height=14.91mm, Manufacturer_Part_Number=6339191-1, Mouser Price/Stock=https://www.mouser.co.uk/ProductDetail/TE-Connectivity-AMP/6339191-1?qs=6KRng%2F8lLtNwkkppUOlXgw%3D%3D
CN9: "TERM BLK 2P SIDE ENT 2.54MM PCB", Color=Green, Current=10A, manufacturer="TE Connectivity AMP Connectors", Supplier Part Number 1=A98333-ND, Voltage=150V, componentlink1description=Datasheet, componentlink1url=https://www.te.com/commerce/DocumentDelivery/DDEController?Action=srchrtrv&DocNm=282834&DocType=Customer+Drawing&DocLang=English, componentlink2description="DigiKey Link", componentlink2url=http://digikey.com/product-detail/en/te-connectivity-amp-connectors/282834-2/A98333-ND/1150135, lastupdated="1/15/2020 4:15:38 AM", Lifecycle Status=Active, Mating Orientation="Horizontal with Board", Minimum Order=1, Mounting Type="Through Hole", Number of Levels=1, packaging=Bulk, Part Number=282834-2, Part Status=Active, Pitch="0.100\" (2.54mm)", Positions Per Level=2, price=0.88, series=Buchanan, Supplier 1=DigiKey, Wire Gauge="16-30 AWG", Wire Termination="Screw - Rising Cage Clamp"
D1 D2 D5: library part Diode, "Default Diode", Code_JEDEC=DO-214-AB, LatestRevisionDate=17-Jul-2002, LatestRevisionNote="Re-released for DXP Platform.", PackageDescription="DO-214-AB/SMC; 2 C-Bend Leads; Body 7.9 x 5.9 mm, inc. leads (LxW)", PackageReference=SMC, PackageVersion=Sep-1996, Published=8-Jun-2000, Publisher="Altium Limited"
D3 D4 D6: library part LED3, "Typical BLUE SiC LED", DatasheetVersion=16-Apr-2002, LatestRevisionDate=17-Dec-2003, LatestRevisionNote="PCB Footprint replaced.", PackageDescription="SM LED; 2 C-Bend Leads; Body 3.5 x 2.8 x 1.9 mm, inc leads (LxWxH typ)", PackageReference=3.5X2.8X1.9, PackageVersion=16-Apr-2002, Published=8-Jun-2000, Publisher="Altium Limited"
L1: library part Inductor, "Inductor", Published=8-Jun-2000, Publisher="Altium Limited", Revision="July-2002: Re-released for DXP Platform."
Q1 Q2: "TRANS NPN 40V 0.2A SOT23", Current - Collector (Ic) (Max)="200 mA", Current - Collector Cutoff (Max)="50nA (ICBO)", DC Current Gain (hFE) (Min) @ Ic, Vce="100 @ 10mA, 1V", Frequency - Transition=300MHz, manufacturer="Micro Commercial Co", Operating Temperature="-55°C ~ 150°C (TJ)", Package / Case="TO-236-3, SC-59, SOT-23-3", Power - Max="350 mW", Supplier Device Package=SOT-23, Supplier Part Number 1=MMBT3904TPMSCT-ND, Voltage - Collector Emitter Breakdown (Max)="40 V", componentlink1description=Datasheet, componentlink1url=https://www.mccsemi.com/pdf/Products/MMBT3904(SOT-23).pdf, componentlink2description="DigiKey Link", componentlink2url=https://www.digikey.com/en/products/detail/micro-commercial-co/MMBT3904-TP/717280, lastupdated="2/3/2023 9:11:21 PM", Lifecycle Status=Active, Minimum Order=1, Mounting Type="Surface Mount", packaging=TapeAndReel, Part Number=MMBT3904-TP, Part Status=Active, partid=260, price=0.01, series=-, Supplier 1=DigiKey, Transistor Type=NPN, Vce Saturation (Max) @ Ib, Ic="300mV @ 5mA, 50mA"
R1 R2 R3 R4 R5 R6 R7 R8 R9 R10 R11 R12 R13 R14 R15 R16 R17 R18 R19 R20 R21 R22 R23 R24 R25 R26 R27 R28 R29 R30 R31 R32 R33 R34 R35 R36 R37 R38 R39 R40 R41 R42 R43 R44 R45 R46 R47 R48 R49 R50 R51 R52 R53 R54 R55 R56 R57 R58 R59 R60 R61 R62 R63: "Resistor", LatestRevisionDate=17-Jul-2002, LatestRevisionNote="Re-released for DXP Platform.", PackageDescription="Axial Device, Thru-Hole; 2 Leads; 0.3 in Pin Spacing", PackageReference=AXIAL-0.3, Published=8-Jun-2000, Publisher="Altium Limited"
SB1 SB2 SB3 SB4 SB5 SB6 SB7 SB8 SB9 SB10 SB11 SB12: library part "Circuit Breaker", "Circuit Breaker", Published=24-Mar-1999, Publisher="Altium Limited", Revision="July-2002: Re-released for DXP Platform."
U1: "Integrated Circuit", Manufacturer_Name=STMicroelectronics, Mouser Part Number=511-STM32F103CBT6, Arrow Part Number=STM32F103CBT6, Arrow Price/Stock=https://www.arrow.com/en/products/stm32f103cbt6/stmicroelectronics?region=europe, Datasheet Link=http://www.st.com/st-web-ui/static/active/en/resource/technical/document/datasheet/CD00161566.pdf, Height=1.6mm, Manufacturer_Part_Number=STM32F103CBT6, Mouser Price/Stock=https://www.mouser.co.uk/ProductDetail/STMicroelectronics/STM32F103CBT6?qs=WxFF5lh7QM3goh6GV5Ogig%3D%3D
U2 U4: "Integrated Circuit", Manufacturer_Name=STMicroelectronics, Mouser Part Number=511-USBLC6-2SC6, Arrow Part Number=USBLC6-2SC6, Arrow Price/Stock=https://www.arrow.com/en/products/usblc6-2sc6/stmicroelectronics?region=nac, Datasheet Link=http://www.st.com/st-web-ui/static/active/en/resource/technical/document/datasheet/CD00050750.pdf, Height=1.45mm, Manufacturer_Part_Number=USBLC6-2SC6, Mouser Price/Stock=https://www.mouser.co.uk/ProductDetail/STMicroelectronics/USBLC6-2SC6?qs=po45yt2pPpu%2FhNIlwQdTlg%3D%3D
U3: "Integrated Circuit", Manufacturer_Name=STMicroelectronics, Mouser Part Number=511-LD3985M33R, Arrow Part Number=LD3985M33R, Arrow Price/Stock=https://www.arrow.com/en/products/ld3985m33r/stmicroelectronics?region=nac, Datasheet Link=http://www.st.com/st-web-ui/static/active/en/resource/technical/document/datasheet/CD00003395.pdf, Height=1.45mm, Manufacturer_Part_Number=LD3985M33R, Mouser Price/Stock=https://www.mouser.co.uk/ProductDetail/STMicroelectronics/LD3985M33R?qs=22WmWNTp1rrPOccVv4HZ7A%3D%3D
U5: "Integrated Circuit", Manufacturer_Name="RF SOLUTIONS", Mouser Part Number=223-ESP-12S, Datasheet Link=https://datasheet.datasheetarchive.com/originals/distributors/DKDS42/DSANUWW0049619.pdf, Height=3mm, Manufacturer_Part_Number=ESP-12S, Mouser Price/Stock=https://www.mouser.co.uk/ProductDetail/RF-Solutions/ESP-12S?qs=UkDUCjYnTB27YArJ5wHUxg%3D%3D
U7: "Integrated Circuit", Manufacturer_Name=STMicroelectronics, Mouser Part Number=511-USBLC6-4SC6, Arrow Part Number=USBLC6-4SC6, Arrow Price/Stock=https://www.arrow.com/en/products/usblc6-4sc6/stmicroelectronics?region=nac, Datasheet Link=http://www.st.com/st-web-ui/static/active/en/resource/technical/document/datasheet/CD00047494.pdf, Height=1.45mm, Manufacturer_Part_Number=USBLC6-4SC6, Mouser Price/Stock=https://www.mouser.co.uk/ProductDetail/STMicroelectronics/USBLC6-4SC6?qs=k9dH%2Fx4GHJCNdehb8zInZg%3D%3D
U8: "LAN8742A-CZ-TR - Small Footprint RMII 10/100 Ethernet, Transceiver with HP Auto-MDIX and flexPWR Technology SQFN-24", Manuf_1=MICROCHIP, Distrib=MICROCHIP, Manuf_Part_1=LAN8742A-CZ-TR, Order=LAN8742A-CZ-TR
W1: library part Jumper, "Jumper Wire", LatestRevisionDate=17-Jul-2002, LatestRevisionNote="Re-released for DXP Platform.", PackageDescription="Radial Cap, Thru-Hole; 2 Leads; 0.2 in Pin Spacing", PackageReference=RAD-0.2, Published=24-Mar-1999, Publisher="Altium Limited"
X1: library part ECS-120-20-3X-EN-TR, "CRYSTAL 12.0000MHZ 20PF SMD", ESR (Equivalent Series Resistance)="60 Ohms", Frequency="12 MHz", Frequency Stability=±50ppm, Frequency Tolerance=±30ppm, Load Capacitance=20pF, manufacturer="ECS Inc.", Operating Mode=Fundamental, Operating Temperature="-40°C ~ 85°C", Package / Case=HC-49/US, Supplier Part Number 1=XC1787CT-ND, componentlink1description=Datasheet, componentlink1url=http://www.ecsxtal.com/store/pdf/CSM-3X.pdf, componentlink2description="DigiKey Link", componentlink2url=https://www.digikey.com/en/products/detail/ecs-inc/ECS-120-20-3X-EN-TR/2676617, Height - Seated (Max)="0.091\" (2.30mm)", lastupdated="2/3/2023 8:57:34 PM", Lifecycle Status=Active, Minimum Order=1, Mounting Type="Surface Mount", packaging=TapeAndReel, Part Number=ECS-120-20-3X-EN-TR, Part Status=Active, partid=407, price=0.23, series=CSM-3X, Size / Dimension="0.276\" L x 0.161\" W (7.00mm x 4.10mm)", Supplier 1=DigiKey, Type="MHz Crystal"
X2: "Crystal or Oscillator", Arrow Part Number="EB2532JA12-25.000M TR", Manufacturer_Name=Ecliptek, Mouser Part Number=669-EB2532JA12-25T, Arrow Price/Stock=https://www.arrow.com/en/products/eb2532ja12-25.000m-tr/ecliptek, Datasheet Link="https://componentsearchengine.com/Datasheets/1/EB2532JA12-25.000M TR.pdf", Height=0.8mm, Manufacturer_Part_Number="EB2532JA12-25.000M TR", Mouser Price/Stock=https://www.mouser.com/Search/Refine.aspx?Keyword=669-EB2532JA12-25T

## Via types
v1: diameter 17.72, hole 7.87, Top Layer to Bottom Layer, 112 vias
v2: diameter 25.98, hole 12.99, Top Layer to Bottom Layer, 2 vias

## Nets (pads, with @x,y where several pads share a name; then routed paths per layer and width w, separated by ;. In a path a pad name is that pad's centre, name@x,y a point inside that pad or via, vN(x,y) a via of type N, cw(c..) or ccw(c..) an arc to the next point about the centre after c; other vN are vias at no path point)
3V3: C16.1 C17.1 C22.1 CN2.P4 CN7.1 CN9.1 L1.2 R1.1 R2.1 R3.1 R4.1 R5.1 R6.2 R31.2 R34.2 R35.2 R37.2 R41.2 R42.2 R43.2 R49.2 R51.2 U5.8 U8.9 | length 8706
  Top Layer w4: U5.8@2546.61,3544.96 2546.61,3631 2609.56,3693.95 C16.1@2609.56,3733 2609.56,3760 ; C17.1@2609.56,3784.25 2609.56,3760 ; v1(2630,2692) 2630.44,2692.44 v1@2637,2692.44 ; R37.2@2661,2692.44 v1@2637,2692.44 ; L1.2@2901.5,4433 2777.5,4309 2552,4309 2540,4297 2540,3974 2623,3891 2688,3891 2698.98,3880 ; U8.9@2970.2,3990.84 2912.96,3990.84 2907,3984.88 C22.1@2851,3984.88 2825,3984.88 2824,3985.88 R42.2@2798.75,3985.88 2798.75,3968 2788.75,3958 2748,3958 2726,3936 2726,3880 ; R49.2@2984.25,3744.14 2984.25,3777 ; v1(3780,3603) R34.2@3604.56,3603 3604.56,3520 3561.56,3477 3080,3477 3070,3487 ; R31.2@4054,3509.56 v1(4054,3557) ; v1(4059.78,1845) 4190,1975.22 CN2.P4@4224.94,1975.22 4338,1975.22 4401,1912.22 4401,1528.44 ; R1.1@4325,1528.44 R2.1@4377,1528.44 4401,1528.44 ; R6.2@4588,1528.44 4559.44,1528.44 4559,1528.88 R5.1@4532.25,1528.88 4506.44,1528.88 4506,1528.44 R4.1@4481,1528.44 R3.1@4429,1528.44 4401,1528.44 ; 2609.56,3760 2622.56,3747 R35.2@2805.44,3747 2808.49,3804.05 ; v1@2637,2692.44 2637,2814 2656,2833 2656,3070 3070,3487 ; 2698.98,3880 2726,3880 ; 2698.98,3880 R41.2@2698.98,3858 2726,3858 2726,3880 ; 2726,3880 2775,3880 2775,3867.58 2784,3858.58 R43.2@2808.49,3858.58 2808.49,3804.05 ; 2808.49,3804.05 2839.49,3777 2984.25,3777 ; 2984.25,3777 3074.25,3777 3091.25,3760 R51.2@3091.25,3744.14 3091.25,3711 3070,3689.75 3070,3487
  Mid Layer 1 w4: v1(2630,2692) 2630,2242 CN7.1@2392,2004 3386,2004 3406,1984 3406,1795 ; CN9.1@3406,1652 3406,1795 ; v1(3780,3603) 3826,3557 v1(4054,3557) ; v1(4059.78,1845) 3456,1845 3406,1795
AIN_1: R13.1 R14.1 R18.1 U1.10 | length 259.4
  Top Layer w4: R18.1@3191,2159 3191,2191 3228.56,2228.56 R14.1@3228.56,2261.56 R13.1@3228.56,2318.81 3244.48,2318.81 3268,2342.34 U1.10@3302.82,2342.34
EN: CN7.7 R35.1 U5.3 | length 1403.2
  Top Layer w4: R35.1@2860.56,3747 2860.56,3688.76 2940.32,3609 U5.3@2940.32,3544.96 v1(2940.32,3480.92)
  Bottom Layer w4: CN7.7@2392,2604 2940.32,3152.32 v1(2940.32,3480.92)
FS_DM_N: CN1.16 CN6.2 U4.1 U4.6 | length 2463.1
  Top Layer w4: CN1.16@2746.89,1799.4 2746.89,1864.97 2759.06,1877.14 2759.06,1920.83 v1(2746.89,1933) ; U4.6@3981.34,3221.6 U4.1@4079.76,3221.6 4166,3221.6 4169.03,3224.63 CN6.2@4255.69,3224.63
  Bottom Layer w4: v1(2746.89,1933) 2778.89,1933 3783.89,2938 3969.06,2938 CN6.2@4255.69,3224.63
FS_DM_P: CN1.17 CN6.3 U4.3 U4.4 | length 2761.6
  Top Layer w4: CN1.17@2727.2,1799.4 2727.2,1877 v1(2743.2,1893) ; U4.4@3981.34,3296.4 U4.3@4079.76,3296.4 4164,3296.4 4170.97,3303.37 CN6.3@4255.69,3303.37
  Mid Layer 2 w4: v1(2743.2,1893) 2864,1893 3019.01,2048.01 3019.01,2252.01 3464,2697 3936,2697 4213,2974 4213,3260.68 CN6.3@4255.69,3303.37
G_A: CN8.12 R62.2 U8.2 | length 1211.3
  Top Layer w4: U8.2@3074.53,4055.8 3074.53,4144 3096.53,4166 3488,4166 3638,4316 3904,4316 3938.56,4350.56 R62.2@3938.56,4373 4013,4373 4013.31,4372.69 CN8.12@4089.46,4372.69
G_K: CN8.11 R63.2 | length 151.6
  Top Layer w4: R63.2@3938.89,4425.25 4012,4425.25 4014.57,4422.69 CN8.11@4089.46,4422.69